# Altium PCB PCB_1192025.PcbDoc
Units mm, origin at the board's own origin, x right, y up, seen from the top; angles counter-clockwise.
Board outline 100.08 x 69.98 mm, 2 copper layers (Top Layer, Bottom Layer); 20 components, 21 nets, 150 pads, 0 vias.
Unrouted connection lines stored in the file: 4.
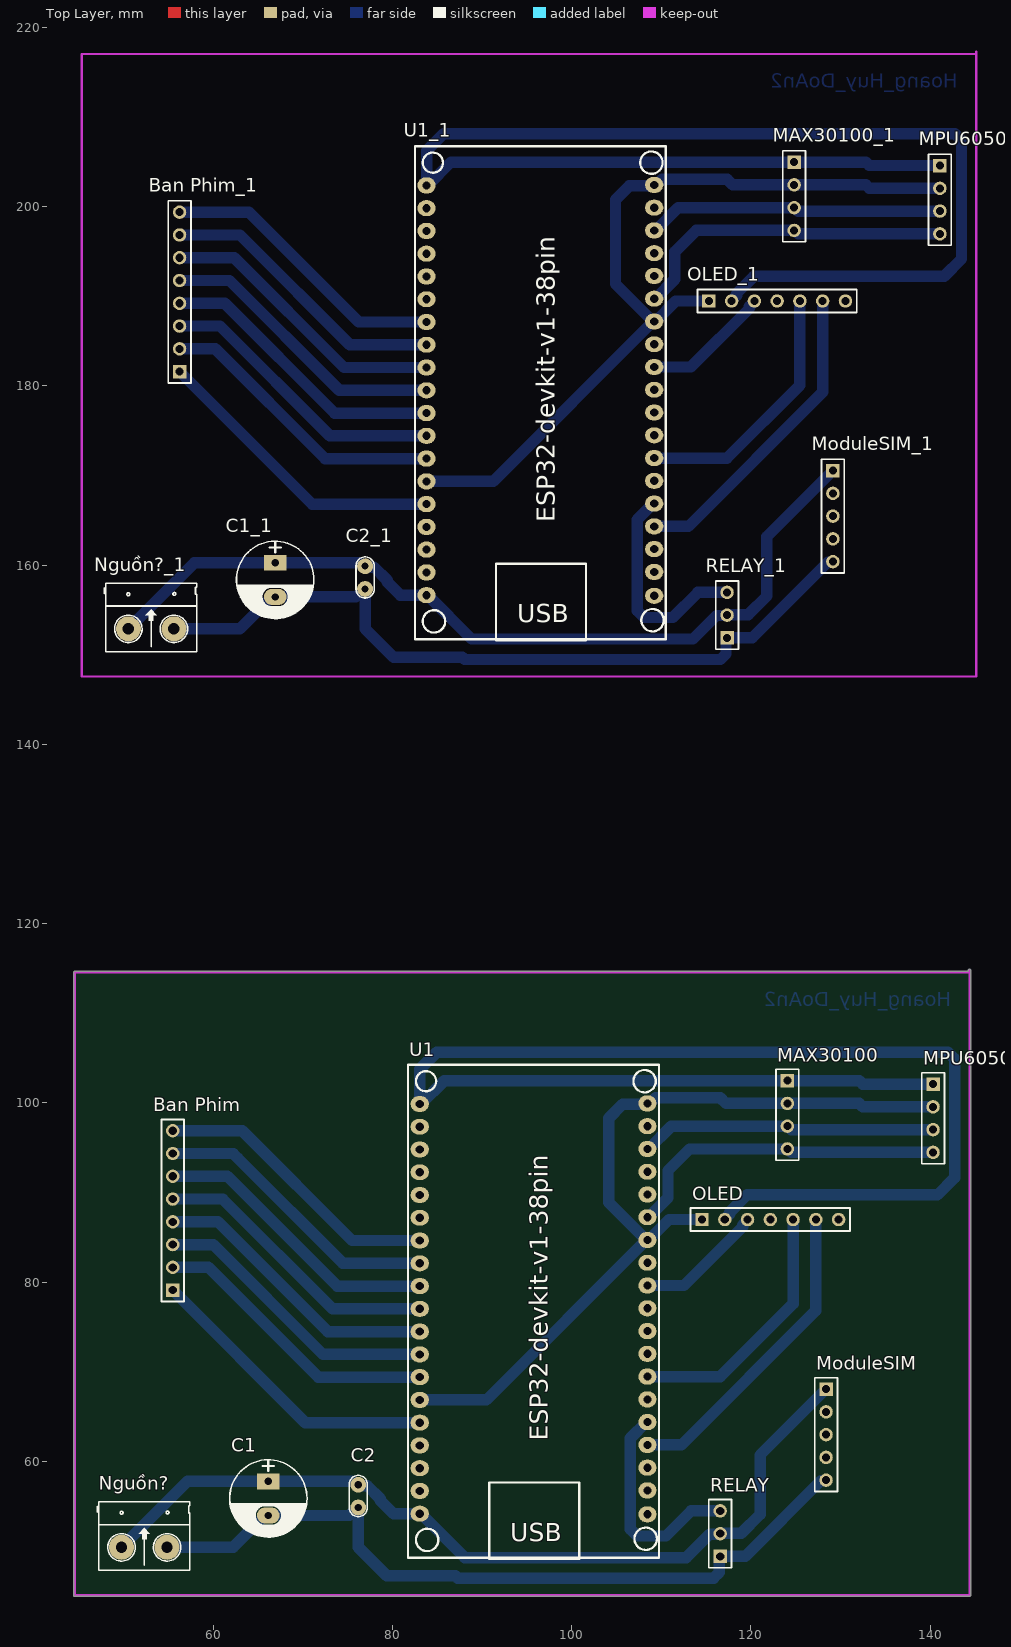
[diagram p0: Top Layer view]
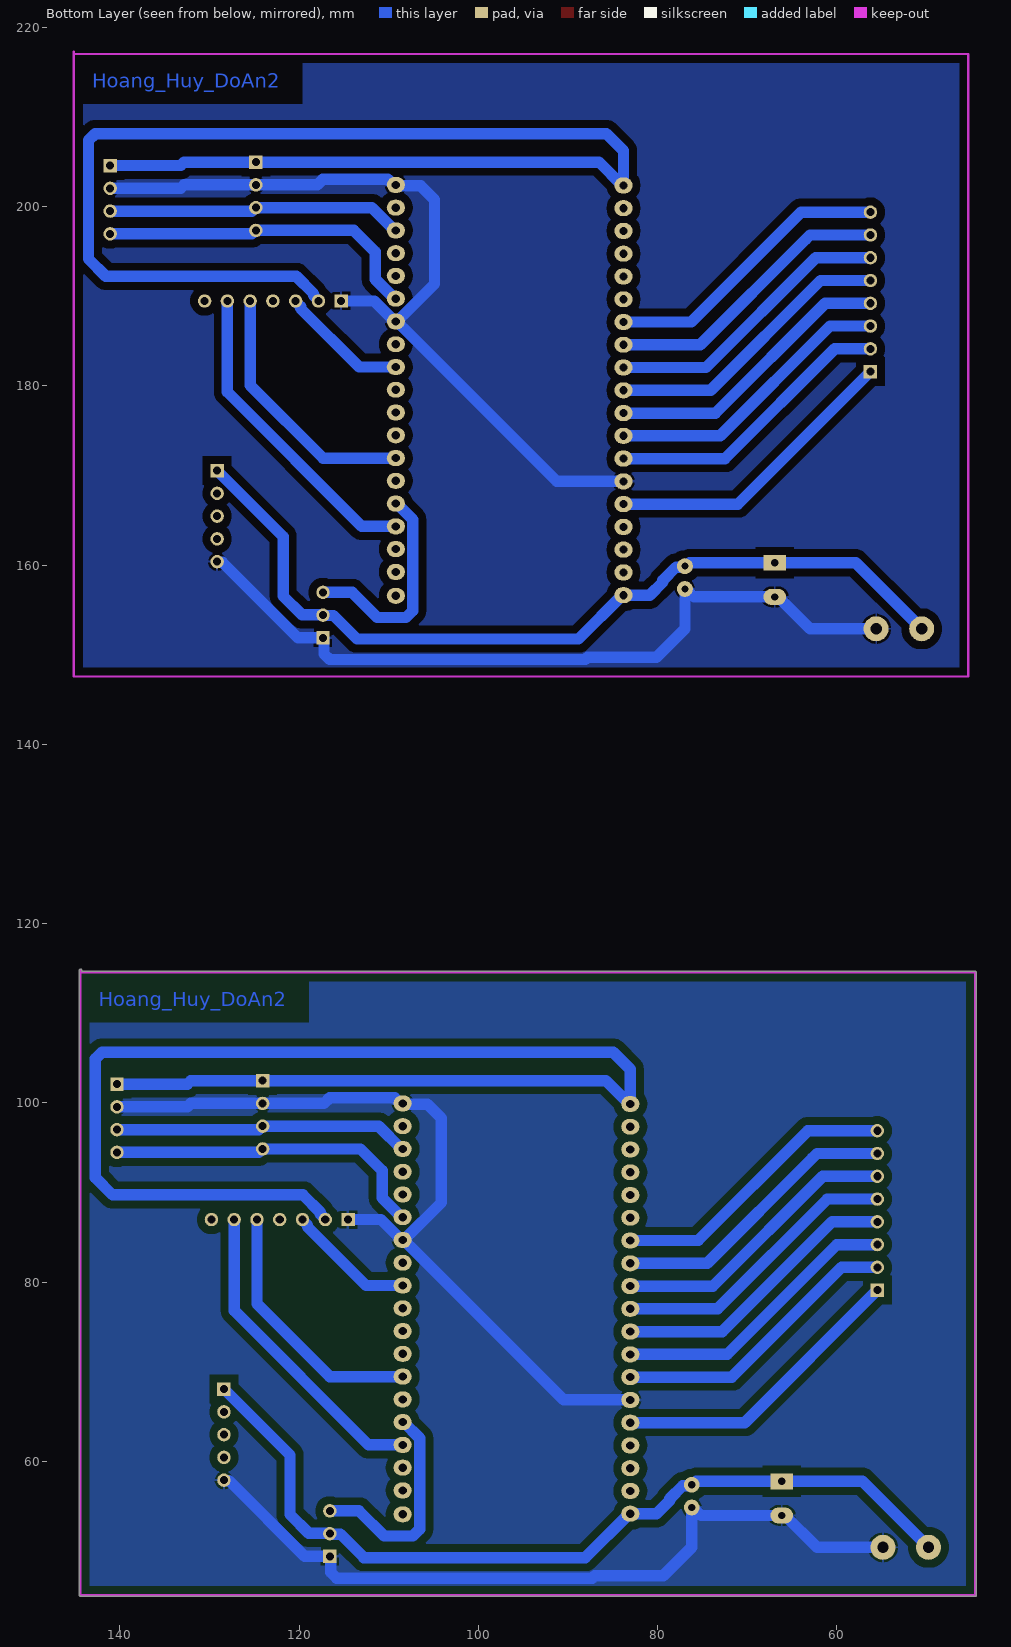
[diagram p1: Bottom Layer view, seen from below]

## Layer stack, top to bottom
Top Solder: solder mask 0.0102, Solder Resist, Dk 3.5
Top Layer: signal copper 0.0356
Dielectric 1: dielectric 0.32, FR-4, Dk 4.8
Bottom Layer: signal copper 0.0356
Bottom Solder: solder mask 0.0102, Solder Resist, Dk 3.5

## Board outline
44.577,44.958 cw(c44.577,45.085) 44.45,45.085 44.45,114.554 cw(c44.577,114.554) 44.577,114.681 144.272,114.681 144.272,114.808 cw(c144.399,114.808) 144.526,114.808 144.526,45.085 cw(c144.399,45.085) 144.399,44.958

## Design rules (kind name [scope] priority, off if disabled: settings)
Clearance [All] p1: gap=0.9 ignorepadtopadclearanceinfootprint=FALSE
PolygonConnect [All] p1: connectstyle=Relief reliefconductorwidth=0.254 reliefentries=4 polygonreliefangle="90 Angle" airgapwidth=0.254
RoutingVias [All] p1: holewidth=0.711 width=1.27 viastyle="Through Hole" minholewidth=0.711 minwidth=1.27 maxholewidth=0.711 maxwidth=1.27
SolderMaskExpansion [All] p1: expansion=0.102 istentingtop=FALSE
Width [All] p1: maxlimit=2.54 minlimit=0.254 preferedwidth=1.27
30 further rules are at their usual default settings.

## Classes and differential pairs
component class Schematic: "Ban Phim" C1 C2 MAX30100 ModuleSIM MPU6050 Nguồn? OLED RELAY U1

## Components (designator, comment, footprint, x,y, rotation, side; value= is the part's Value field where it differs from the comment)
"Ban Phim" "Header 8" HDR1X8 55.499,79.121 r90 top
"Ban Phim_1" "Header 8" HDR1X8 56.261,181.61 r90 top (schematic designator "Ban Phim")
C1 "100uF/25V" CP1.5/3.4 66.167,57.785 r270 top value=100uF/35V/50V
C1_1 "100uF/25V" CP1.5/3.4 66.929,160.274 r270 top value=100uF/35V/50V (schematic designator C1)
C2 "104" CN1 76.2,54.864 r90 top value=100pF
C2_1 "104" CN1 76.962,157.353 r90 top value=100pF (schematic designator C2)
MAX30100 "Header 4" HDR1X4 124.079,102.489 r270 top
MAX30100_1 "Header 4" HDR1X4 124.841,204.978 r270 top (schematic designator MAX30100)
ModuleSIM "Header 5" HDR1X5 128.397,68.072 r270 top
ModuleSIM_1 "Header 5" HDR1X5 129.159,170.561 r270 top (schematic designator ModuleSIM)
MPU6050 "Header 4" HDR1X4 140.335,102.108 r270 top
MPU6050_1 "Header 4" HDR1X4 141.097,204.597 r270 top (schematic designator MPU6050)
Nguồn? "Header 2" HED2 49.784,50.419 r0 top
Nguồn?_1 "Header 2" HED2 50.546,152.908 r0 top (schematic designator Nguồn?)
OLED "Header 7" HDR1X7 114.554,86.995 r0 top
OLED_1 "Header 7" HDR1X7 115.316,189.484 r0 top (schematic designator OLED)
RELAY "Header 3" HDR1X3 116.586,49.403 r90 top
RELAY_1 "Header 3" HDR1X3 117.348,151.892 r90 top (schematic designator RELAY)
U1 "ESP32-DEVKI-V1.0-PIN38" ESP32-DEVKIT-V1.0-38PIN 95.758,76.71 r0 top
U1_1 "ESP32-DEVKI-V1.0-PIN38" ESP32-DEVKIT-V1.0-38PIN 96.52,179.199 r0 top (schematic designator U1)

## Footprints (in the part's own frame and the unit in brackets; to place one, negate y for a bottom-side part, rotate by r counter-clockwise, add the part's x,y. Pads: shape width x height; smd on the part's side, far side on the other; paste and mask are expansions set on the pad)
CN1 [mil]
  round 70 hole 31: 1(0,0) 2(100,0)
  silkscreen extent -40,-40 141,40, body extent -60,-30 170,37, height 265
CP1.5/3.4 [mil] "Tu hoa 220->470uF,16V, 470uF/16V,25V"
  rect 70x100 hole 32: 1(0,0)
  oval 70x100 hole 32: 2(150,0)
  silkscreen extent -95,-170 245,170, body extent -85,-157 230,157, height 446
ESP32-DEVKIT-V1.0-38PIN [mil] "DEVKIT 38 PIN"
  oval 80x70 hole 36: 1(-500,912.59) 2(-500,812.59) 3(-500,712.59) 4(-500,612.59) 5(-500,512.59) 6(-500,412.59) 7(-500,312.59) 8(-500,212.59) 9(-500,112.59) 10(-500,12.59) 11(-500,-87.41) 12(-500,-187.41) 13(-500,-287.41) 14(-500,-387.41) 15(-500,-487.41) 16(-500,-587.41) 17(-500,-687.41) 18(-500,-787.41) 19(-500,-887.41) 20(500,-890.09) 21(500,-785.09) 22(500,-685.09) 23(500,-585.09) 24(500,-485.09) 25(500,-385.09) 26(500,-285.09) 27(500,-185.09) 28(500,-85.09) 29(500,14.91) 30(500,114.91) 31(500,214.91) 32(500,314.91) 33(500,414.91) 34(500,514.91) 35(500,614.91) 36(500,714.91) 37(500,814.91) 38(500,914.91)
  silkscreen extent -551,-1085 551,1085, body extent -547,-1092 555,1092, height 269
HDR1X3 [mm] "Connector; Header; 3 Position"
  rect 1.5x1.5 hole 0.9: 1(0,0)
  round 1.5 hole 0.9: 2(2.54,0) 3(5.08,0)
  silkscreen extent -1.27,-1.27 6.35,1.27, body extent -1.27,-1.27 6.35,1.27, height 7
HDR1X4 [mm] "Connector; Header; 4 Position"
  rect 1.5x1.5 hole 0.9: 1(0,0)
  round 1.5 hole 0.9: 2(2.54,0) 3(5.08,0) 4(7.62,0)
  silkscreen extent -1.27,-1.27 8.89,1.27, body extent -1.27,-1.27 8.89,1.27, height 7
HDR1X5 [mm] "Connector; Header; 5 Position"
  rect 1.5x1.5 hole 0.9: 1(0,0)
  round 1.5 hole 0.9: 2(2.54,0) 3(5.08,0) 4(7.62,0) 5(10.16,0)
  silkscreen extent -1.27,-1.27 11.43,1.27, body extent -1.27,-1.27 11.43,1.27, height 7
HDR1X7 [mm] "Connector; Header; 7 Position"
  rect 1.5x1.5 hole 0.9: 1(0,0)
  round 1.5 hole 0.9: 2(2.54,0) 3(5.08,0) 4(7.62,0) 5(10.16,0) 6(12.7,0) 7(15.24,0)
  silkscreen extent -1.27,-1.27 16.51,1.27, body extent -1.27,-1.27 16.51,1.27, height 7
HDR1X8 [mm] "Connector; Header; 8 Position"
  rect 1.5x1.5 hole 0.9: 1(0,0)
  round 1.5 hole 0.9: 2(2.54,0) 3(5.08,0) 4(7.62,0) 5(10.16,0) 6(12.7,0) 7(15.24,0) 8(17.78,0)
  silkscreen extent -1.27,-1.27 19.05,1.27, body extent -1.27,-1.27 19.05,1.27, height 7
HED2 [mil] "Header 2, 2 pin, hight 300mil, Pin to Pin 200, Colour Green"
  round 110 hole 50: 1(0,0) 2(200,0)
  silkscreen extent -106,-100 300,200, body extent -92,-140 302,155, height 394

## Part data
"Ban Phim" "Ban Phim_1": "Header, 8-Pin", LatestRevisionDate=17-Jul-2002, LatestRevisionNote="Re-released for DXP Platform.", Publisher="Altium Limited"
C1 C1_1: library part CP3, "Cap 100uF/35V - 470uF/16V", Description 1="1000uF/6,3V - 470uF/16V - 330uF - 25V", Description 2="220uF/35V - 100uF/50V - 63V - 4,7uF/200V", Description 3="22uF => 33uF100V - 3,3uF => 4,7uF/250V", Description 4="2,2uF =>3,3uF/350 - 2,2uF/400V - 1uF/450V"
C2 C2_1: library part CN1, "Cap np  1pF - 472pF"
MAX30100 MAX30100_1 MPU6050 MPU6050_1: "Header, 4-Pin", LatestRevisionDate=17-Jul-2002, LatestRevisionNote="Re-released for DXP Platform.", Publisher="Altium Limited"
ModuleSIM ModuleSIM_1: "Header, 5-Pin", LatestRevisionDate=17-Jul-2002, LatestRevisionNote="Re-released for DXP Platform.", Publisher="Altium Limited"
Nguồn? Nguồn?_1: library part Hed2, "Header 2 (Green)"
OLED OLED_1: "Header, 7-Pin", LatestRevisionDate=17-Jul-2002, LatestRevisionNote="Re-released for DXP Platform.", Publisher="Altium Limited"
RELAY RELAY_1: "Header, 3-Pin", LatestRevisionDate=17-Jul-2002, LatestRevisionNote="Re-released for DXP Platform.", Publisher="Altium Limited"

## Nets (pads, with @x,y where several pads share a name; then routed paths per layer and width w, separated by ;. In a path a pad name is that pad's centre, name@x,y a point inside that pad or via, vN(x,y) a via of type N, cw(c..) or ccw(c..) an arc to the next point about the centre after c; other vN are vias at no path point)
3.3V: MAX30100.1 MPU6050.1 OLED.2 U1.1 | length 164.2
  Bottom Layer w1.27: OLED.2 117.094,87.057 117.649,87.612 117.649,87.817 119.578,89.747 140.819,89.747 142.748,91.676 142.748,104.92 142.004,105.664 84.963,105.664 83.058,103.759 U1.1 83.185,99.89 85.784,102.489 MAX30100.1 132.09,102.489 132.471,102.108 MPU6050.1
+5V: C1.1 C2.2 ModuleSIM.1 Nguồn?.1 RELAY.2 U1.19 | length 97
  Bottom Layer w1.27: Nguồn?.1 57.15,57.785 C1.1 75.682,57.785 76.063,57.404 C2.2 76.297,57.307 77.185,57.307 78.661,55.831 78.661,55.646 80.137,54.17 U1.19 83.185,54.17 88.079,49.276 112.788,49.276 115.411,51.899 116.542,51.899 116.63,51.987 118.934,51.987 121.031,54.084 121.031,60.706 ModuleSIM.1
CLK: OLED.3 U1.30 | length 14.4
  Bottom Layer w1.27: U1.30 112.535,79.629 119.079,86.173 119.079,86.378 119.634,86.933 OLED.3
CS: OLED.7 U1.29
DC: OLED.6 U1.23 | length 35.2
  Bottom Layer w1.27: U1.23 112.268,61.849 127.254,76.835 OLED.6
GND: C1.2 C2.1 MAX30100.2 ModuleSIM.5 MPU6050.2 Nguồn?.2 OLED.1 RELAY.1 U1.14 U1.32 U1.38 | length 179.6
  Bottom Layer w1.27: Nguồn?.2 62.23,50.419 65.786,53.975 C1.2 75.174,53.975 76.063,54.864 C2.1 76.2,50.419 79.375,47.244 87.042,47.244 87.296,46.99 115.842,46.99 116.471,47.619 116.471,49.288 RELAY.1 119.38,49.403 127.845,57.868 128.353,57.868 ModuleSIM.5 ; U1.14 90.492,66.87 U1.32@108.331,84.709 ; U1.38@108.331,99.949 U1.38 ; OLED.1 110.871,86.995 108.585,84.709 U1.32 U1.32@108.331,84.709 ; MPU6050.2 132.471,99.568 132.09,99.949 MAX30100.2 117.231,99.949 116.596,100.584 109.357,100.584 108.722,99.949 U1.38 ; U1.32@108.331,84.709 104.14,88.9 104.14,98.298 105.694,99.852 108.361,99.852 U1.38
MOSI: OLED.4 U1.37
"NetBan Phim_1": "Ban Phim.1" U1.15 | length 33.8
  Bottom Layer w1.27: 55.499,79.121 70.29,64.33 U1.15 U1.15@82.99,64.262
"NetBan Phim_2": "Ban Phim.2" U1.13 | length 32.8
  Bottom Layer w1.27: 55.499,81.661 59.48,81.661 71.731,69.41 U1.13 U1.13@82.961,69.507
"NetBan Phim_3": "Ban Phim.3" U1.12 | length 32.8
  Bottom Layer w1.27: 55.499,84.201 60.008,84.201 72.26,71.95 U1.12 U1.12@82.961,72.047
"NetBan Phim_4": "Ban Phim.4" U1.11 | length 32.8
  Bottom Layer w1.27: 55.499,86.741 60.537,86.741 72.788,74.49 U1.11 U1.11@82.961,74.587
"NetBan Phim_5": "Ban Phim.5" U1.10 | length 32.8
  Bottom Layer w1.27: 55.499,89.281 61.066,89.281 73.317,77.03 U1.10 U1.10@82.961,77.127
"NetBan Phim_6": "Ban Phim.6" U1.9 | length 32.8
  Bottom Layer w1.27: 55.499,91.821 61.595,91.821 73.846,79.57 U1.9 U1.9@82.961,79.667
"NetBan Phim_7": "Ban Phim.7" U1.8 | length 32.8
  Bottom Layer w1.27: 55.499,94.361 62.23,94.361 62.737,93.854 74.481,82.11 U1.8 U1.8@82.961,82.207
"NetBan Phim_8": "Ban Phim.8" U1.7 | length 32.8
  Bottom Layer w1.27: 55.499,96.901 63.246,96.901 75.497,84.65 U1.7 U1.7@82.961,84.747
NetModuleSIM_3: ModuleSIM.3 U1.28
NetModuleSIM_4: ModuleSIM.4 U1.27
RELAY: RELAY.3 U1.24 | length 24.3
  Bottom Layer w1.27: U1.24 108.357,64.389 106.553,62.585 106.553,52.452 107.327,51.678 110.523,51.678 113.328,54.483 RELAY.3
RES: OLED.5 U1.26 | length 29
  Bottom Layer w1.27: U1.26 116.586,69.469 124.714,77.597 OLED.5
SCL: MAX30100.3 MPU6050.3 U1.36 | length 33.1
  Bottom Layer w1.27: U1.36 108.585,94.869 111.125,97.409 MAX30100.3 124.141,97.409 124.522,97.028 MPU6050.3
SDA: MAX30100.4 MPU6050.4 U1.33 | length 37
  Bottom Layer w1.27: U1.33 108.585,87.249 110.757,89.421 110.757,92.469 113.157,94.869 MAX30100.4 124.141,94.869 124.522,94.488 MPU6050.4
pads on no net: "Ban Phim_1.1" "Ban Phim_1.2" "Ban Phim_1.3" "Ban Phim_1.4" "Ban Phim_1.5" "Ban Phim_1.6" "Ban Phim_1.7" "Ban Phim_1.8" C1_1.1 C1_1.2 C2_1.1 C2_1.2 MAX30100_1.1 MAX30100_1.2 MAX30100_1.3 MAX30100_1.4 ModuleSIM.2 ModuleSIM_1.1 ModuleSIM_1.2 ModuleSIM_1.3 ModuleSIM_1.4 ModuleSIM_1.5 MPU6050_1.1 MPU6050_1.2 MPU6050_1.3 MPU6050_1.4 Nguồn?_1.1 Nguồn?_1.2 OLED_1.1 OLED_1.2 OLED_1.3 OLED_1.4 OLED_1.5 OLED_1.6 OLED_1.7 RELAY_1.1 RELAY_1.2 RELAY_1.3 U1.2 U1.3 U1.4 U1.5 U1.6 U1.16 U1.17 U1.18 U1.20 U1.21 U1.22 U1.25 U1.31 U1.34 U1.35 U1_1.1 U1_1.2 U1_1.3 U1_1.4 U1_1.5 U1_1.6 U1_1.7 U1_1.8 U1_1.9 U1_1.10 U1_1.11 U1_1.12 U1_1.13 U1_1.14 U1_1.15 U1_1.16 U1_1.17 U1_1.18 U1_1.19 U1_1.20 U1_1.21 U1_1.22 U1_1.23 U1_1.24 U1_1.25 U1_1.26 U1_1.27 U1_1.28 U1_1.29 U1_1.30 U1_1.31 U1_1.32 U1_1.33 U1_1.34 U1_1.35 U1_1.36 U1_1.37 U1_1.38
copper on no net: | length 876.8
  Bottom Layer w1.27: 50.546,152.908 57.912,160.274 66.929,160.274 76.444,160.274 76.825,159.893 76.962,159.893 77.059,159.796 77.947,159.796 79.423,158.32 79.423,158.135 80.899,156.659 83.82,156.659 83.947,156.659 88.841,151.765 113.55,151.765 116.173,154.388 117.304,154.388 117.392,154.476 119.696,154.476 121.793,156.573 121.793,163.195 129.159,170.561 ; 55.626,152.908 62.992,152.908 66.548,156.464 66.929,156.464 75.936,156.464 76.825,157.353 76.962,157.353 76.962,152.908 80.137,149.733 87.804,149.733 88.058,149.479 116.604,149.479 117.233,150.108 117.233,151.777 117.348,151.892 120.142,151.892 128.607,160.357 129.115,160.357 129.159,160.401 ; 56.261,181.61 71.052,166.819 83.82,166.819 83.752,166.751 ; 56.261,184.15 60.242,184.15 72.493,171.899 83.82,171.899 83.723,171.996 ; 56.261,186.69 60.77,186.69 73.022,174.439 83.82,174.439 83.723,174.536 ; 56.261,189.23 61.299,189.23 73.55,176.979 83.82,176.979 83.723,177.076 ; 56.261,191.77 61.828,191.77 74.079,179.519 83.82,179.519 83.723,179.616 ; 56.261,194.31 62.357,194.31 74.608,182.059 83.82,182.059 83.723,182.156 ; 56.261,196.85 62.992,196.85 63.499,196.343 75.243,184.599 83.82,184.599 83.723,184.696 ; 56.261,199.39 64.008,199.39 76.259,187.139 83.82,187.139 83.723,187.236 ; 83.82,169.359 91.254,169.359 109.093,187.198 ; 109.093,202.438 109.22,202.438 ; 109.22,164.338 113.03,164.338 128.016,179.324 128.016,189.484 ; 109.22,166.878 109.119,166.878 107.315,165.074 107.315,154.941 108.089,154.167 111.285,154.167 114.09,156.972 117.348,156.972 ; 109.22,171.958 117.348,171.958 125.476,180.086 125.476,189.484 ; 109.22,182.118 113.297,182.118 119.841,188.662 119.841,188.867 120.396,189.422 120.396,189.484 ; 109.22,189.738 109.347,189.738 111.519,191.91 111.519,194.958 113.919,197.358 124.841,197.358 124.903,197.358 125.284,196.977 141.097,196.977 ; 109.22,197.358 109.347,197.358 111.887,199.898 124.841,199.898 124.903,199.898 125.284,199.517 141.097,199.517 ; 115.316,189.484 111.633,189.484 109.347,187.198 109.22,187.198 109.093,187.198 ; 117.856,189.484 117.856,189.546 118.411,190.101 118.411,190.306 120.34,192.236 141.581,192.236 143.51,194.165 143.51,207.409 142.766,208.153 85.725,208.153 83.82,206.248 83.82,202.379 83.947,202.379 86.546,204.978 124.841,204.978 132.852,204.978 133.233,204.597 141.097,204.597 ; 141.097,202.057 133.233,202.057 132.852,202.438 124.841,202.438 117.993,202.438 117.358,203.073 110.119,203.073 109.484,202.438 109.22,202.438 ; 109.093,187.198 104.902,191.389 104.902,200.787 106.456,202.341 109.123,202.341 109.22,202.438

## Polygon pours and split planes (outlines as drawn)
no net on Bottom Layer "NONET_L02_P001" (solid, remove dead copper, pour order 1): 145.161,217.043 145.161,147.574 45.466,147.574 45.339,147.701 45.339,217.043
GND on Bottom Layer "GND_L02_P000" (solid, remove dead copper, pour order 0): 144.399,114.554 144.399,45.085 44.704,45.085 44.577,45.212 44.577,114.554

## Keep-outs
Keep-Out Layer:
  lines w0.254: 144.399,114.554 44.577,114.554 44.577,45.085 144.399,45.085 144.399,114.808 ; 145.161,217.043 45.339,217.043 45.339,147.574 145.161,147.574 145.161,217.297

## Other copper
Bottom Layer:
  text "Hoang_Huy_DoAn2" at 143.11,213.277 h1.6
  text "Hoang_Huy_DoAn2" at 142.348,110.788 h1.6

## Text inside footprints (layer, text, board x,y; h text height)
U1: Top Overlay "ESP32-devkit-v1-38pin" at 97.349,62.298 h2.03 r90; Top Overlay "USB" at 93.158,51.122 h2.03
U1_1: Top Overlay "USB" at 93.92,153.611 h2.03; Top Overlay "ESP32-devkit-v1-38pin" at 98.111,164.787 h2.03 r90